# Altium PCB PCB2.PcbDoc
Units mm, origin at the board's own origin, x right, y up, seen from the top; angles counter-clockwise.
Board outline 66.57 x 100.13 mm, 2 copper layers (Top Layer, Bottom Layer); 27 components, 22 nets, 189 pads, 14 vias.
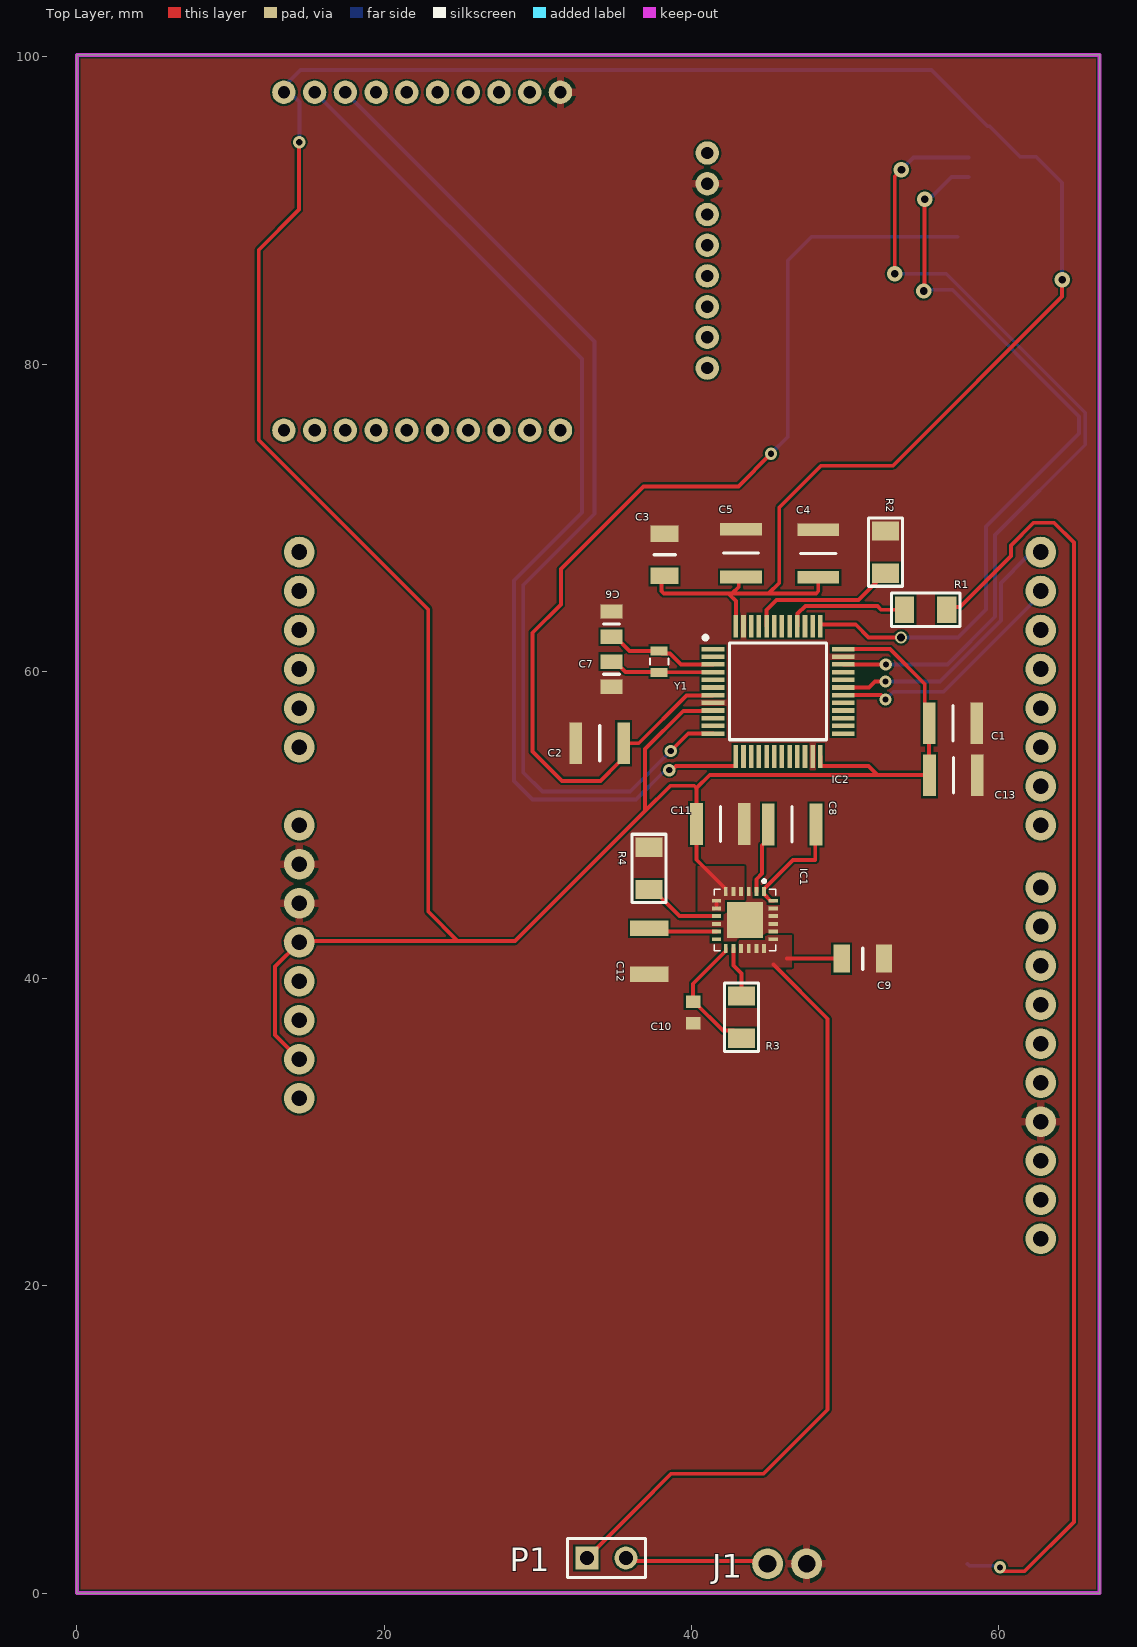
[diagram p0: Top Layer view]
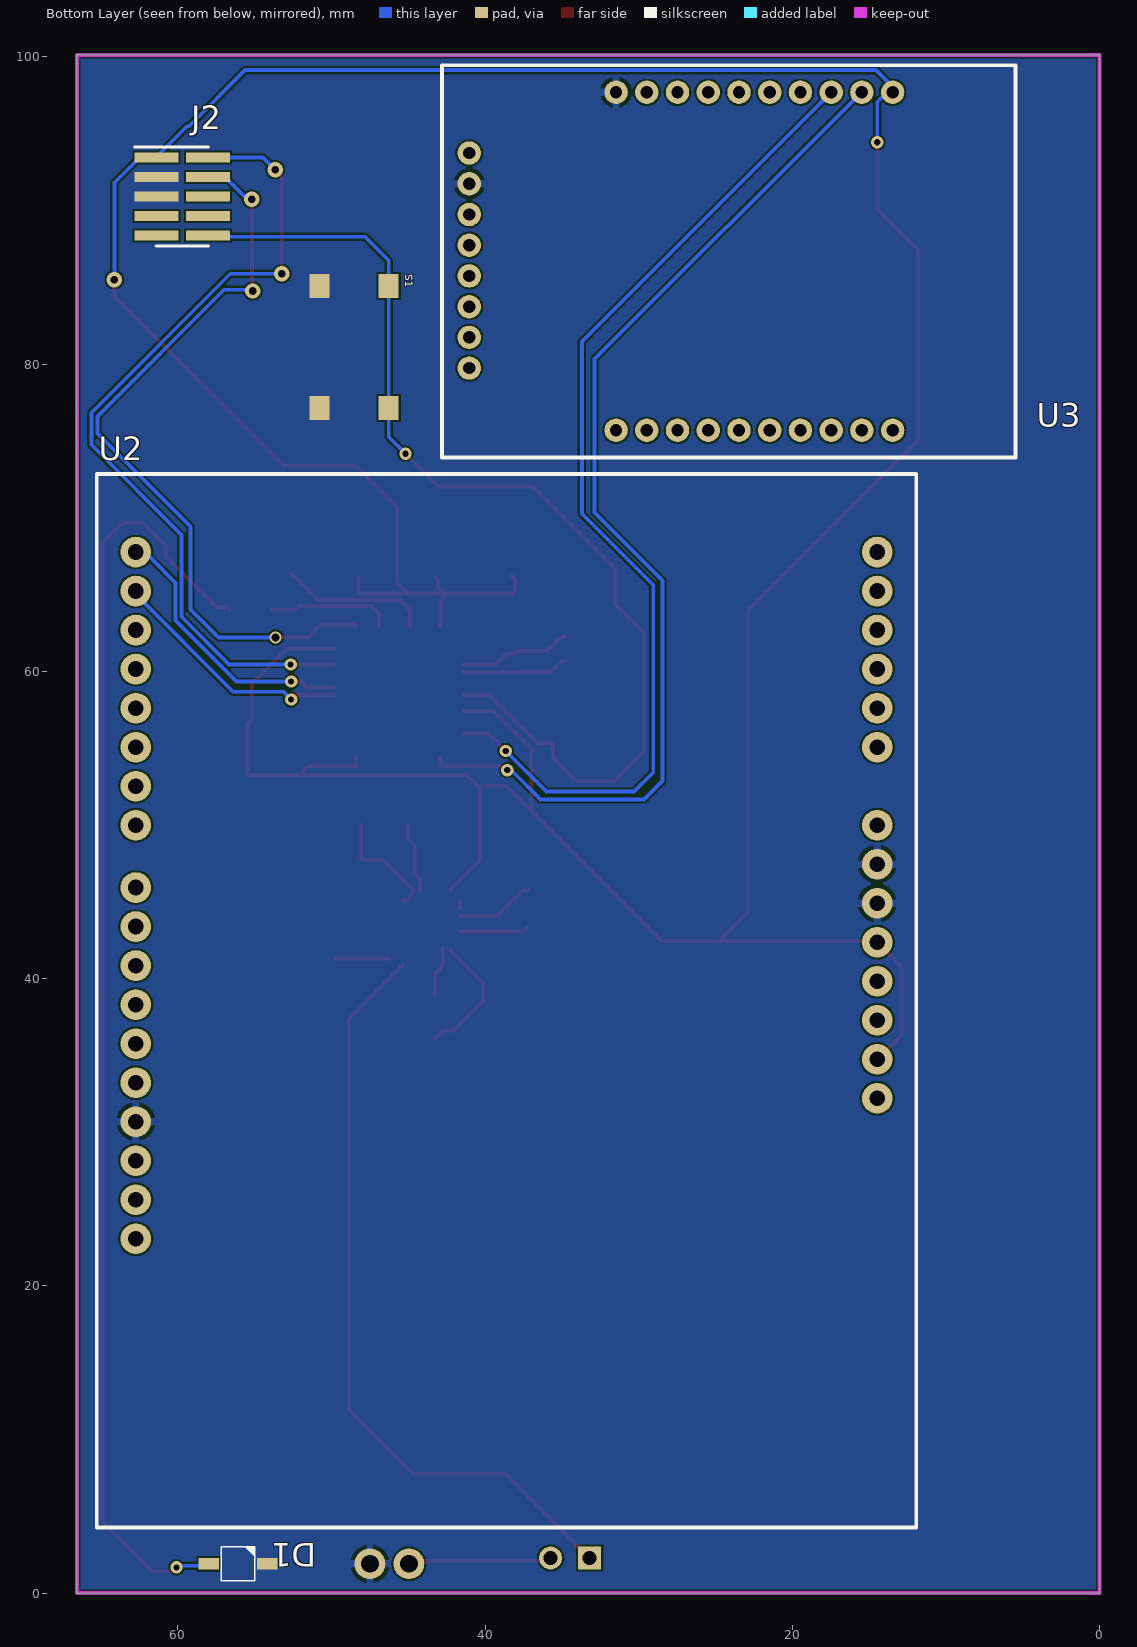
[diagram p1: Bottom Layer view, seen from below]
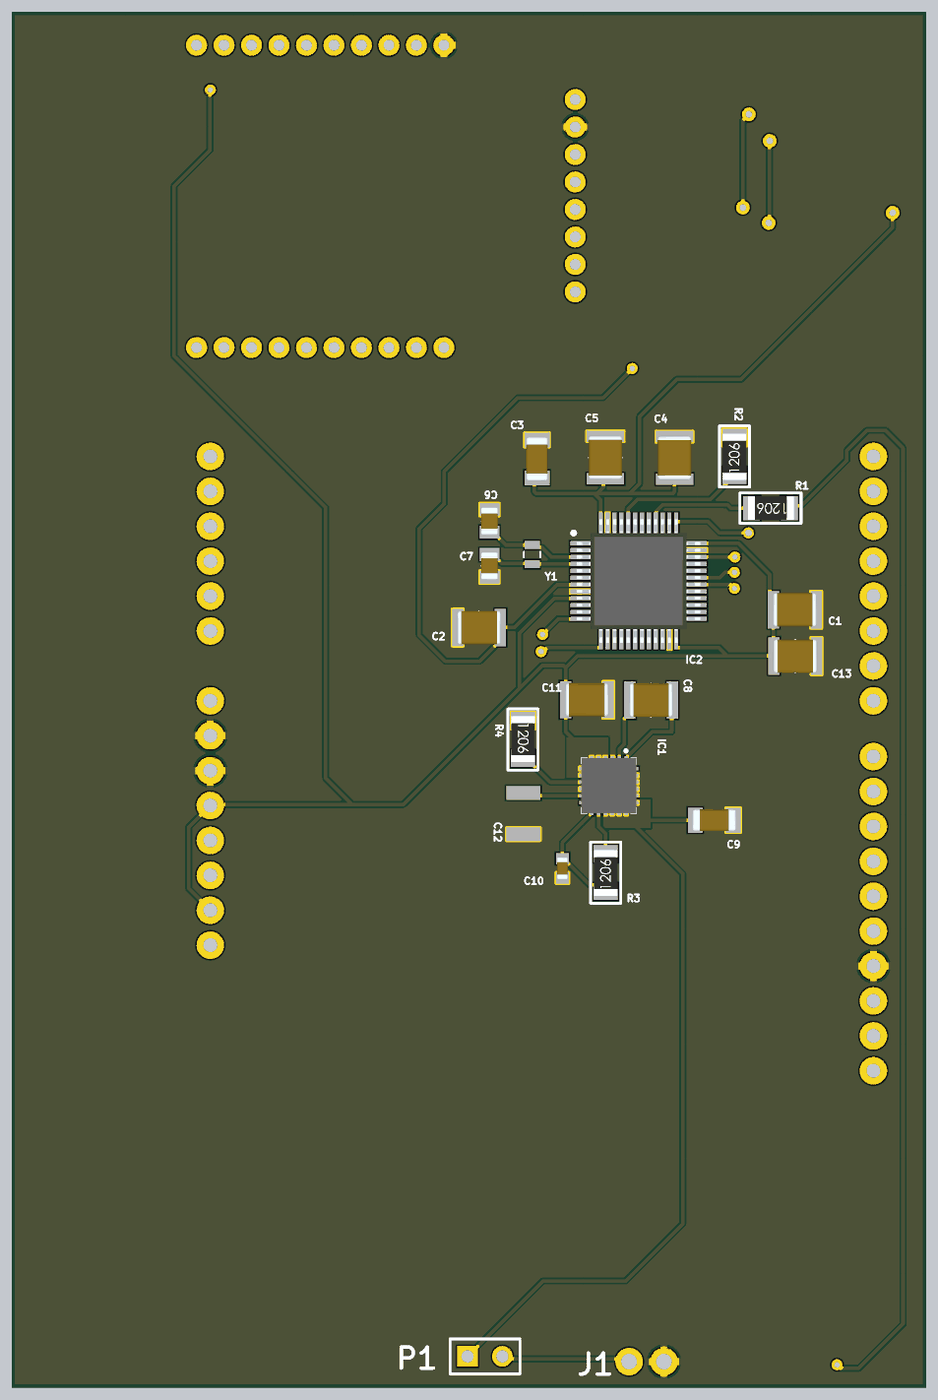
[diagram p2: 3D render of the assembled board from above, using the file's embedded part models]

## Layer stack, top to bottom
Top Solder: solder mask 0.0102, Solder Resist, Dk 3.5
Top Layer: signal copper 0.0356
Dielectric 1: dielectric 0.32, FR-4, Dk 4.8
Bottom Layer: signal copper 0.0356
Bottom Solder: solder mask 0.0102, Solder Resist, Dk 3.5

## Board outline
0,0 0,100.127 66.573,100.127 66.573,0

## Design rules (kind name [scope] priority, off if disabled: settings)
BoardOutlineClearance [All] p1: gap=0.2 ignorepadtopadclearanceinfootprint=FALSE except(0.4: Arc-SplitBarrior Arc-SplitContinuation Track-SplitBarrior Track-SplitContinuation SMDPad-SplitBarrior SMDPad-SplitContinuation THPad-SplitBarrior THPad-SplitContinuation Via-SplitBarrior Via-SplitContinuation Fill-SplitBarrior Fill-SplitContinuation Poly-SplitBarrior Poly-SplitContinuation Region-SplitBarrior Region-SplitContinuation Text-SplitBarrior Text-SplitContinuation)
Clearance [All] p1: gap=0.127 ignorepadtopadclearanceinfootprint=FALSE
HoleSize [All] p1: absolutevalues=TRUE maxlimit=6.3 minlimit=0.2 maxpercent=80.000 minpercent=20.000
MinimumAnnularRing [All] p1: minimumring=0.076
MinimumSolderMaskSliver [All] p1: minsoldermaskwidth=0.1
PolygonConnect PolygonConnect_1 [All] p1: thpad.connectstyle=Relief thpad.reliefconductorwidth=0.508 thpad.reliefentries=4 thpad.polygonreliefangle="90 Angle" thpad.airgapwidth=0.254 smdpad.connectstyle=Direct smdpad.reliefconductorwidth=0.508 smdpad.reliefentries=4 smdpad.polygonreliefangle="90 Angle" smdpad.airgapwidth=0.254 via.connectstyle=Direct via.reliefconductorwidth=0.508 via.reliefentries=4 via.polygonreliefangle="90 Angle" via.airgapwidth=0.254
RoutingCorners [All] p1: cornerstyle=Round minsetback=2.54 maxsetback=2.54
RoutingVias [All] p1: holewidth=0.5 width=1 viastyle="Through Hole" minholewidth=0.2 minwidth=0.45 maxholewidth=1 maxwidth=2
SilkToSilkClearance [All] p1: silktosilkclearance=0.1
SilkToSolderMaskClearance [IsPad] p1: minsilkscreentomaskgap=0.1 clearancetoexposedcopper=TRUE
SolderMaskExpansion [All] p1: expansion=0.102 istentingtop=FALSE
Width [All] p1: maxlimit=2.54 minlimit=0.089 preferedwidth=0.381
25 further rules are at their usual default settings.

## Components (designator, comment, footprint, x,y, rotation, side; value= is the part's Value field where it differs from the comment)
C1 "0.1uF" CAPC3225X220N 57.024,56.617 r0 top
C2 "0.1uF" CAPC3225X220N 34.035,55.321 r180 top
C3 "4.7uF" CAPC3216X180N 38.252,67.589 r270 top
C4 "0.1uF" CAPC3225X220N 48.26,67.665 r90 top
C5 "0.1uF" CAPC3225X220N 43.231,67.69 r90 top
C6 "4.3pF" CAPC2012X100N 34.798,63.075 r270 top
C7 "4.3pF" CAPC2012X100N 34.798,59.81 r90 top
C8 "0.1uF" CAPC3225X220N 46.558,50.038 r0 top
C9 "4.7uF" CAPC3216X180N 51.156,41.3 r0 top
C10 "2.2uF" CAPC1608X90N 40.107,37.795 r270 top
C11 "47uF" CAPC3225X270N 41.885,50.063 r0 top
C12 "CAPACITOR" 1210 37.262,41.783 r90 top value=5600pF
C13 "0.1uF" CAPC3225X220N 57.048,53.238 r0 top
D1 "LED" VSMB2020 56.083,1.905 r0 bottom
IC1 "MAXM17633AMG+" MAXM17633AMG 43.485,43.815 r270 top
IC2 "STM32L152CCT6" QFP50P900X900X160-48N 45.644,58.699 r0 top
J1 "2-Way Header" KK2542 47.498,1.905 r180 top
J2 "M50-3600542R" HUSSP10W40P127_2X5_635X340X420P 59.714,90.907 r270 bottom
P1 "Header 2" HDR1X2 33.198,2.286 r0 top
R1 "RESISTOR" 1206 56.623,64.008 r180 top value=510
R2 "RESISTOR" 1206 52.629,66.389 r90 top value=10k
R3 "RESISTOR" 1206 43.256,36.112 r90 top value=100k
R4 "RESISTOR" 1206 37.236,48.546 r270 top value=24.3k
S1 "SW-PB" "SMD Tactile Button" 46.275,85.09 r270 bottom
U2 "zed" zed 14.478,55.067 r180 bottom
U3 "mdot" mdot 41.035,93.739 r270 bottom
Y1 "ECS-.327-CDX-1082" XTAL_ECS-.327-12.5-12-C-TR 37.897,60.63 r270 top

## Footprints (in the part's own frame and the unit in brackets; to place one, negate y for a bottom-side part, rotate by r counter-clockwise, add the part's x,y. Pads: shape width x height; smd on the part's side, far side on the other; paste and mask are expansions set on the pad)
1206 [mm]
  rect 1.25x1.75 smd paste+0: 1(0,0) 2(2.75,0)
  silkscreen extent -0.85,-1.1 3.6,1.1, body extent -0.32,-0.86 3.03,0.87, height 0.85
1210 [mm]
  rect 1x2.5 smd mask+0.08: 1(-1.5,0) 2(1.5,0)
  body extent -1.5,-1 1.5,1, height 2.8
CAPC1608X90N [mm]
  rect 0.82x0.94 smd: 1(-0.7,0) 2(0.7,0)
  body extent -0.8,-0.4 0.8,0.4, height 0.9
CAPC2012X100N [mm]
  rect 0.94x1.43 smd: 1(-0.82,0) 2(0.82,0)
  silkscreen extent 0,-0.53 0,0.53, body extent -1,-0.63 1,0.63, height 1
CAPC3216X180N [mm]
  rect 1.07x1.82 smd: 1(-1.38,0) 2(1.38,0)
  silkscreen extent 0,-0.7 0,0.7, body extent -1.6,-0.8 1.6,0.8, height 1.8
CAPC3225X220N [mm]
  rect 0.82x2.72 smd: 1(-1.55,0) 2(1.55,0)
  silkscreen extent 0,-1.15 0,1.15, body extent -1.6,-1.25 1.6,1.25, height 2.2
CAPC3225X270N [mm]
  rect 0.82x2.72 smd: 1(-1.55,0) 2(1.55,0)
  silkscreen extent 0,-1.15 0,1.15, body extent -1.6,-1.25 1.6,1.25, height 2.7
HDR1X2 [mm] "Connector; Header; 2 Position"
  rect 1.5x1.5 hole 0.9: 1(0,0)
  round 1.5 hole 0.9: 2(2.54,0)
  silkscreen extent -1.27,-1.27 3.81,1.27
HUSSP10W40P127_2X5_635X340X420P [mm]
  rect 0.65x2.85 smd: 1(-2.54,-1.675) 2(-2.54,1.675) 3(-1.27,-1.675) 4(-1.27,1.675) 5(0,-1.675) 6(0,1.675) 7(1.27,-1.675) 8(1.27,1.675) 9(2.54,-1.675) 10(2.54,1.675)
  silkscreen extent -3.21,-3.1 3.21,1.7, body extent -3.32,-2.75 3.33,2.75, height 5.13
KK2542 [mm]
  round 2 hole 1.15 paste+0: 1(0,0) 2(2.54,0)
MAXM17633AMG [mm]
  rect 0.6x0.25 smd: 1(-1.85,1.25) 2(-1.85,0.75) 3(-1.85,0.25) 4(-1.85,-0.25) 5(-1.85,-0.75) 6(-1.85,-1.25) 13(1.85,-1.25) 14(1.85,-0.75) 15(1.85,-0.25) 16(1.85,0.25) 17(1.85,0.75) 18(1.85,1.25)
  rect 0.25x0.6 smd: 7(-1.25,-1.85) 8(-0.75,-1.85) 9(-0.25,-1.85) 10(0.25,-1.85) 11(0.75,-1.85) 12(1.25,-1.85) 19(1.25,1.85) 20(0.75,1.85) 21(0.25,1.85) 22(-0.25,1.85) 23(-0.75,1.85) 24(-1.25,1.85)
  rect 2.35x2.35 smd: 25(0,0)
  silkscreen extent -2.63,-2 2,2, body extent -2,-2 2,2, height 1.9
mdot [mil]
  round 60 hole 31.5: 1(-155.5,1085) 2(-155.5,1006.26) 3(-155.5,927.52) 4(-155.5,848.78) 5(-155.5,770.04) 6(-155.5,691.3) 7(-155.5,612.56) 8(-155.5,533.82) 9(-155.5,455.08) 10(-155.5,376.34) 11(710.64,376.34) 12(710.64,455.08) 13(710.64,533.82) 14(710.64,612.56) 15(710.64,691.3) 16(710.64,770.04) 17(710.64,848.78) 18(710.64,927.52) 19(710.64,1006.26) 20(710.64,1085) 21(0,0) 22(78.74,0) 23(157.48,0) 24(236.22,0) 25(314.96,0) 26(393.7,0) 27(472.44,0) 28(551.18,0)
  silkscreen extent -225,-70 780,1400
QFP50P900X900X160-48N [mm]
  rect 1.475x0.3 smd: 1(-4.238,2.75) 2(-4.238,2.25) 3(-4.238,1.75) 4(-4.238,1.25) 5(-4.238,0.75) 6(-4.238,0.25) 7(-4.238,-0.25) 8(-4.238,-0.75) 9(-4.238,-1.25) 10(-4.238,-1.75) 11(-4.238,-2.25) 12(-4.238,-2.75) 25(4.238,-2.75) 26(4.238,-2.25) 27(4.238,-1.75) 28(4.238,-1.25) 29(4.238,-0.75) 30(4.238,-0.25) 31(4.238,0.25) 32(4.238,0.75) 33(4.238,1.25) 34(4.238,1.75) 35(4.238,2.25) 36(4.238,2.75)
  rect 0.3x1.475 smd: 13(-2.75,-4.238) 14(-2.25,-4.238) 15(-1.75,-4.238) 16(-1.25,-4.238) 17(-0.75,-4.238) 18(-0.25,-4.238) 19(0.25,-4.238) 20(0.75,-4.238) 21(1.25,-4.238) 22(1.75,-4.238) 23(2.25,-4.238) 24(2.75,-4.238) 37(2.75,4.238) 38(2.25,4.238) 39(1.75,4.238) 40(1.25,4.238) 41(0.75,4.238) 42(0.25,4.238) 43(-0.25,4.238) 44(-0.75,4.238) 45(-1.25,4.238) 46(-1.75,4.238) 47(-2.25,4.238) 48(-2.75,4.238)
  silkscreen extent -4.85,-3.15 3.15,3.62, body extent -4.5,-4.5 4.5,4.5, height 1.6
"SMD Tactile Button" [mm] "SMD Tactile Button SPST"
  rect 1.55x1.3 smd: 1(0,0) 1(7.95,0) 2(0,-4.5) 2(7.95,-4.5)
VSMB2020 [mm] "LED VSMB2020"
  rect 1.35x0.75 smd paste+0: 1(1.9,0) 2(-1.9,0)
  silkscreen extent -1.1,-1.1 1.1,1.1, body extent -2.1,-1.15 2.1,1.15, height 2.77
XTAL_ECS-.327-12.5-12-C-TR [mm]
  rect 0.6x1.1 smd: 1(-0.7,0) 2(0.7,0)
  silkscreen extent -0.2,-0.6 0.2,0.6
zed [mm]
  round 2 hole 1.02: 1(-48.26,12.7) 2(-48.26,10.16) 3(-48.26,7.62) 4(-48.26,5.08) 5(-48.26,2.54) 6(-48.26,0) 7(-48.26,-2.54) 8(-48.26,-5.08) 9(-48.26,-9.14) 10(-48.26,-11.68) 11(-48.26,-14.22) 12(-48.26,-16.76) 13(-48.26,-19.3) 14(-48.26,-21.84) 15(-48.26,-24.38) 16(-48.26,-26.92) 17(-48.26,-29.46) 18(-48.26,-32) 19(0,-22.86) 20(0,-20.32) 21(0,-17.78) 22(0,-15.24) 23(0,-12.7) 24(0,-10.16) 25(0,-7.62) 26(0,-5.08) 27(0,0) 28(0,2.54) 29(0,5.08) 30(0,7.62) 31(0,10.16) 32(0,12.7)
  silkscreen extent -50.8,-50.8 2.54,17.78

## Part data
C1 C2 C4 C5 C8 C13: library part GRM32DR72D104KW01L, "Capacitor", Manufacturer_Name="Murata Electronics", Datasheet Link=http://www.murata.com/~/media/webrenewal/support/library/catalog/products/capacitor/mlcc/c02e.pdf, Height=2.2mm, Manufacturer_Part_Number=GRM32DR72D104KW01L
C3: library part GRM31CR71H475KA12L, "Capacitor", Manufacturer_Name="Murata Electronics", Mouser2 Part Number=81-GRM31CR71H475KA2L, Datasheet Link=https://componentsearchengine.com//GRM31CR71H475KA12L.pdf, Height=1.8mm, Manufacturer_Part_Number=GRM31CR71H475KA12L, Mouser2 Price/Stock=https://www.mouser.com/Search/Refine.aspx?Keyword=81-GRM31CR71H475KA2L
C6 C7: library part GQM2195C2E4R3BB12D, "Capacitor", Manufacturer_Name="Murata Electronics", Datasheet Link=https://psearch.en.murata.com/capacitor/product/GQM2195C2E4R3BB12%23.html, Height=1mm, Manufacturer_Part_Number=GQM2195C2E4R3BB12D
C9: library part GRM31CR71H475KA12L, Manufacturer_Name="Murata Electronics", Mouser2 Part Number=81-GRM31CR71H475KA2L, Datasheet Link=https://componentsearchengine.com//GRM31CR71H475KA12L.pdf, Height=1.8mm, Manufacturer_Part_Number=GRM31CR71H475KA12L, Mouser2 Price/Stock=https://www.mouser.com/Search/Refine.aspx?Keyword=81-GRM31CR71H475KA2L
C10: library part GCG188R70J225KE01D, "Capacitor", Manufacturer_Name="Murata Electronics", Datasheet Link=https://psearch.en.murata.com/capacitor/product/GCG188R70J225KE01%23.html, Height=0.9mm, Manufacturer_Part_Number=GCG188R70J225KE01D
C11: library part GRM32ER71A476KE15L, "Capacitor", Manufacturer_Name="Murata Electronics", Datasheet Link=http://psearch.en.murata.com/capacitor/product/GRM32ER71A476KE15%23.pdf, Height=2.7mm, Manufacturer_Part_Number=GRM32ER71A476KE15L
C12: "Capacitor", Voltage Rating=V
IC1: "Integrated Circuit", Manufacturer_Name="Maxim Integrated", Height=1.8mm, Manufacturer_Part_Number=MAXM17633AMG+
IC2: "Integrated Circuit", Manufacturer_Name=STMicroelectronics, Datasheet Link=https://componentsearchengine.com/Datasheets/2/STM32L152CCT6.pdf, Height=1.6mm, Manufacturer_Part_Number=STM32L152CCT6
J1: library part HEADER2
J2: "Connector", Manufacturer_Name=Harwin, Mouser2 Part Number=855-M50-3600542R, Datasheet Link=https://componentsearchengine.com//M50-3600542R.pdf, Manufacturer_Part_Number=M50-3600542R, Mouser2 Price/Stock=https://www.mouser.com/Search/Refine.aspx?Keyword=855-M50-3600542R
P1: "Header, 2-Pin", LatestRevisionDate=17-Jul-2002, LatestRevisionNote="Re-released for DXP Platform.", Publisher="Altium Limited"
R1 R2 R3 R4: "Resistor"
S1: "Switch", Digikey Part No.=CKN9084CT-ND
Y1: "32.768kHz Â±20ppm Crystal 4pF 60 kOhms 2-SMD, No Lead", Package="SMD-2 ECS International", Digi-Key_Part_Number=XC2123CT-ND, Digi-Key_Purchase_URL=https://www.digikey.com/product-detail/en/ecs-inc/ECS-.327-CDX-1082/XC2123CT-ND/5875606?utm_source=snapeda&utm_medium=aggregator&utm_campaign=symbol, MF="ECS Inc.", MP=ECS-.327-CDX-1082, SnapEDA_Link=https://www.snapeda.com/parts/ECS-.327-CDX-1082/ECS%20Inc./view-part/2078085/?ref=snap

## Via types
v1: diameter 0.8, hole 0.4, Top Layer to Bottom Layer, 8 vias
v2: diameter 1, hole 0.5, Top Layer to Bottom Layer, 5 vias
v3: diameter 0.8, hole 0.5, Top Layer to Bottom Layer, 1 vias

## Nets (pads, with @x,y where several pads share a name; then routed paths per layer and width w, separated by ;. In a path a pad name is that pad's centre, name@x,y a point inside that pad or via, vN(x,y) a via of type N, cw(c..) or ccw(c..) an arc to the next point about the centre after c; other vN are vias at no path point)
AVDD: C1.1 C3.2 C4.1 C5.1 C11.1 C13.1 IC1.4 IC1.5 IC1.6 IC1.7 IC1.8 IC2.9 IC2.24 IC2.36 IC2.48 J2.1 U2.20 U2.23 U3.1 | length 259.8
  Top Layer w0.254: U2.23@13.589,42.465 U2.23@14.478,42.465 ; U2.20 12.903,36.322 12.903,40.792 U2.23 ; U2.23@14.478,42.439 24.783,42.439 ; v1(14.478,94.437) 14.453,94.412 14.453,90.054 11.836,87.437 11.836,75.071 22.87,64.038 22.87,44.359 24.783,42.446 24.783,42.439 ; C3.2 38.049,66.006 38.049,65.218 38.198,65.069 42.415,65.069 ; IC2.9 41.383,57.426 39.469,57.426 36.982,54.94 36.982,50.902 ; IC1.8 IC1.7 ; IC1.6 42.235,45.836 40.335,47.736 C11.1 40.335,52.404 ; IC2.48 42.894,64.571 42.415,65.049 42.415,65.069 ; C5.1 43.084,65.993 43.084,65.498 42.655,65.069 ; C4.1 48.26,65.214 48.111,65.065 45.022,65.065 ; IC2.24 48.394,53.874 48.417,53.851 51.522,53.851 52.11,53.263 ; IC2.36 52.927,61.449 55.191,59.186 55.191,56.9 C1.1 55.474,53.263 52.11,53.263 ; v2(64.135,85.496) 64.135,84.404 53.111,73.381 48.438,73.381 45.72,70.663 45.72,65.763 45.022,65.065 ; 24.783,42.439 28.52,42.439 36.982,50.902 ; 36.982,50.902 38.633,52.553 40.186,52.553 40.335,52.404 ; 40.335,52.404 41.194,53.263 52.11,53.263 ; 42.415,65.069 42.655,65.069 ; 42.655,65.069 42.66,65.065 45.022,65.065
  Bottom Layer w0.254: v1(14.478,94.437) 14.478,97.056 13.476,98.058 14.554,99.136 55.625,99.136 59.282,95.479 59.411,95.479 61.392,93.497 62.438,93.497 64.135,91.801 v2(64.135,85.496)
MDOT_RX: IC2.12 U3.3 | length 67.3
  Top Layer w0.254: v1(38.659,54.813) 39.795,55.949 IC2.12
  Bottom Layer w0.254: U3.3 33.706,81.459 33.706,70.256 29.058,65.608 29.058,53.416 30.302,52.172 36.017,52.172 v1(38.659,54.813)
MDOT_TX: IC2.13 U3.2 | length 70.3
  Top Layer w0.254: v1(38.557,53.569) 38.705,53.569 38.987,53.851 42.871,53.851 42.894,53.874 IC2.13
  Bottom Layer w0.254: U3.2 15.513,97.688 32.881,80.321 32.881,70.346 28.454,65.92 28.454,52.867 29.658,51.664 36.398,51.664 38.199,53.464 38.453,53.464 v1(38.557,53.569)
NetC6_2: C6.2 IC2.3 Y1.1 | length 7.4
  Top Layer w0.254: C6.2 35.043,62.255 35.969,61.33 Y1.1 38.069,61.157 38.605,61.157 39.313,60.449 IC2.3
NetC7_2: C7.2 IC2.4 Y1.2 | length 6.9
  Top Layer w0.254: C7.2 35.043,60.63 35.703,59.969 37.857,59.969 Y1.2 37.907,59.94 41.396,59.94 IC2.4
NetC8_1: C8.1 IC1.2 | length 4.7
  Top Layer w0.254: IC1.2 44.235,46.349 44.236,46.35 44.236,46.382 44.238,46.384 44.238,46.465 44.602,46.829 44.602,48.683 45.008,49.088 C8.1
NetC8_2: C8.2 IC1.1 IC1.24 | length 7.6
  Top Layer w0.254: IC1.24 45.333,45.067 45.162,45.067 44.735,45.494 IC1.1 44.735,45.836 46.625,47.727 48.06,47.727 48.06,49.991 C8.2
NetC10_1: C10.1 IC1.13 R3.1 | length 8.5
  Top Layer w0.254: IC1.13 42.235,41.794 40.107,39.666 C10.1 40.167,38.495 42.052,36.61 42.758,36.61 R3.1
NetC12_2: C12.2 IC1.11 | length 4.5
  Top Layer w0.254: C12.2 37.48,43.065 IC1.11
NetD1_1: D1.1 R1.1 | length 83.6
  Top Layer w0.254: R1.1 56.795,64.179 57.481,64.179 60.807,67.505 60.807,68.198 62.281,69.672 63.602,69.672 64.897,68.377 64.897,4.633 61.687,1.422 v1@60.091,1.422
  Bottom Layer w0.254: D1.1 58.107,1.781 59.987,1.781 v1(60.091,1.676)
NetIC1_9: IC1.9 R4.2 | length 5.1
  Top Layer w0.254: R4.2 37.486,45.796 39.218,44.065 IC1.9
NetIC1_14: IC1.14 R3.2 | length 3.3
  Top Layer w0.254: IC1.14 42.735,40.857 43.256,40.335 R3.2
NetIC2_40: IC2.40 R1.2 | length 8.1
  Top Layer w0.254: IC2.40 46.917,62.96 46.917,63.757 47.422,64.262 51.841,64.262 51.855,64.248 52.105,64.248 52.345,64.008 R1.2
NetIC2_44: IC2.44 R2.1 | length 9.8
  Top Layer w0.254: IC2.44 44.894,63.995 45.542,64.643 45.847,64.643 50.883,64.643 R2.1
NRST: C2.1 IC2.7 J2.10 S1.1 | length 69.5
  Top Layer w0.254: IC2.7 41.383,58.426 39.681,58.426 36.576,55.321 C2.1 35.585,54.371 35.302,54.088 34.086,52.872 31.583,52.872 29.667,54.788 29.667,62.509 31.51,64.352 31.51,66.664 36.881,72.034 43.053,72.034 v1(45.187,74.168)
  Bottom Layer w0.254: v1(45.187,74.168) 46.275,75.256 46.275,77.14 46.275,85.09 46.275,86.737 47.828,88.29 J2.10@57.328,88.29
PGND: C1.2 C2.2 C3.1 C4.2 C5.2 C6.1 C7.1 C9.2 C10.2 C11.2 C12.1 C13.2 D1.2 IC1.3 IC1.10 IC1.20 IC1.21 IC1.22 IC1.23 IC1.25 IC2.8 IC2.23 IC2.35 IC2.47 J1.1 J2.3 J2.5 R2.2 R4.1 S1.2 U2.15 U2.24 U2.25 U3.10 U3.22
SWCLK: IC2.37 J2.4 | length 50.1
  Top Layer w0.254: IC2.37 48.394,63.02 48.417,63.043 50.698,63.043 51.537,62.205 v3(53.645,62.205) ; v2(55.118,84.76) 55.169,84.811 55.169,90.703 v2(55.194,90.729)
  Bottom Layer w0.254: v3(53.645,62.205) 57.353,62.205 59.182,64.033 59.182,69.418 65.24,75.476 65.24,76.593 56.998,84.836 55.194,84.836 v2(55.118,84.76) ; v2(55.194,90.729) 55.337,90.872 55.634,90.872 56.939,92.177 J2.4
SWDIO: IC2.34 J2.2 | length 54.7
  Top Layer w0.254: IC2.34 52.657,60.449 v1(52.659,60.447) ; v2(53.238,85.877) 53.238,92.227 v2(53.67,92.659)
  Bottom Layer w0.254: v1(52.659,60.447) 56.663,60.447 59.766,63.551 59.766,68.885 65.634,74.752 65.634,76.835 56.591,85.877 v2(53.238,85.877) ; v2(53.67,92.659) 54.458,93.447 J2.2
V_BAT: C9.1 IC1.15 IC1.16 IC1.17 IC1.18 IC1.19 P1.1 | length 53.7
  Top Layer w0.254: P1.1 36.398,5.486 38.684,7.772 44.704,7.772 48.87,11.938 48.87,37.389 45.339,40.919 ; 46.228,41.3 C9.1
V_RAW: J1.2 P1.2 | length 9.6
  Top Layer w0.254: P1.2 35.928,2.096 44.767,2.096 J1.2 ; J1.2@44.92,1.461 J1.2@45.06,1.321
ZED_RX: IC2.30 U2.2 | length 16
  Top Layer w0.254: IC2.30 52.345,58.449 v1(52.629,58.166)
  Bottom Layer w0.254: v1(52.629,58.166) 53.137,58.674 56.413,58.674 62.738,64.999 U2.2
ZED_TX: IC2.31 U2.1 | length 18.9
  Top Layer w0.254: IC2.31 51.567,58.949 51.952,59.334 v1(52.629,59.334)
  Bottom Layer w0.254: v1(52.629,59.334) 56.185,59.334 60.147,63.297 60.147,65.761 61.82,67.433 62.27,67.433 62.337,67.366 U2.1 ; U2.1@62.312,67.392 62.312,68.201 U2.1@62.382,68.271
pads on no net: IC1.12 IC2.1 IC2.2 IC2.5 IC2.6 IC2.10 IC2.11 IC2.14 IC2.15 IC2.16 IC2.17 IC2.18 IC2.19 IC2.20 IC2.21 IC2.22 IC2.25 IC2.26 IC2.27 IC2.28 IC2.29 IC2.32 IC2.33 IC2.38 IC2.39 IC2.41 IC2.42 IC2.43 IC2.45 IC2.46 J2.6 J2.7 J2.8 J2.9 U2.3 U2.4 U2.5 U2.6 U2.7 U2.8 U2.9 U2.10 U2.11 U2.12 U2.13 U2.14 U2.16 U2.17 U2.18 U2.19 U2.21 U2.22 U2.26 U2.27 U2.28 U2.29 U2.30 U2.31 U2.32 U3.4 U3.5 U3.6 U3.7 U3.8 U3.9 U3.11 U3.12 U3.13 U3.14 U3.15 U3.16 U3.17 U3.18 U3.19 U3.20 U3.21 U3.23 U3.24 U3.25 U3.26 U3.27 U3.28

## Polygon pours and split planes (outlines as drawn)
PGND on Top Layer "PGND_L01_P020" (solid, pour order 20): 0,0 66.573,0 66.573,100.127 66.398,99.951 0,99.951
V_BAT on Top Layer "V_BAT_L01_P018" (solid, pour order 18): 44.806,42.824 46.533,42.824 46.533,40.742 43.129,40.742 43.078,40.792 43.078,42.443 43.129,42.494 44.78,42.494 44.806,42.469 44.806,42.748 44.856,42.799
AVDD on Top Layer "AVDD_L01_P005" (solid, pour order 5): 43.434,47.32 40.411,47.32 40.411,44.374 42.215,44.374 42.215,45.085 43.434,45.085
PGND on Bottom Layer "PGND_L02_P019" (solid, pour order 19): 0,0 66.573,0 66.573,99.967 66.413,100.127 0,100.127

## Keep-outs
Keep-Out Layer:
  the board outline again, w0.254